# Altium PCB coilcube_v6.PcbDoc
Units mil, origin at the board's own origin, x right, y up, seen from the top; angles counter-clockwise.
Board outline 2150 x 950 mil, 4 copper layers (Top Layer, Signal Layer 1, Signal Layer 2, Bottom Layer), stack 30.634 mil thick; 85 components, 60 nets, 299 pads, 115 vias.
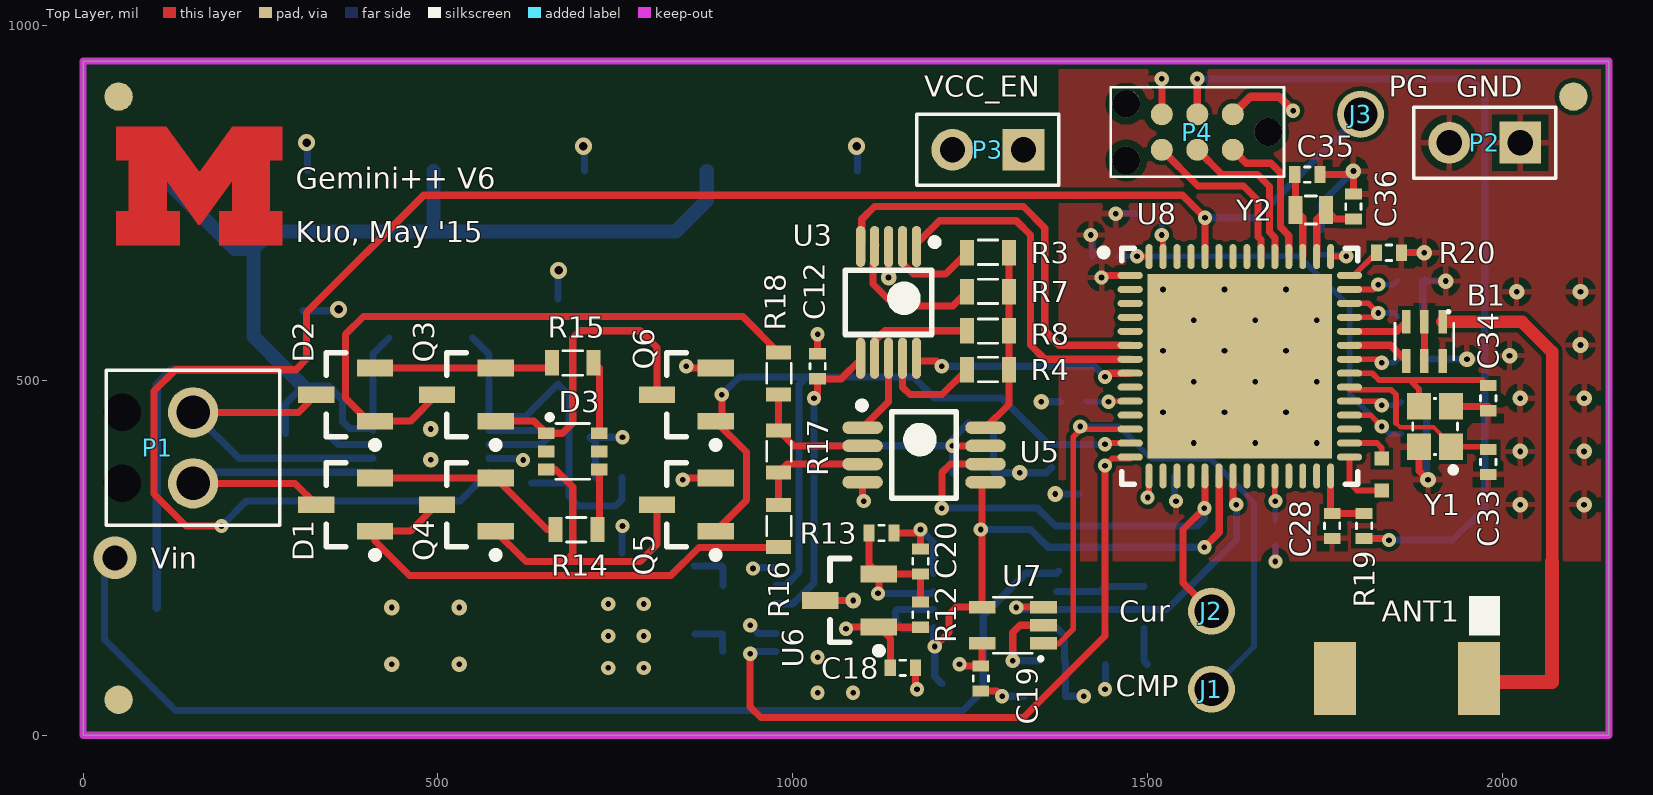
[diagram p0: Top Layer view]
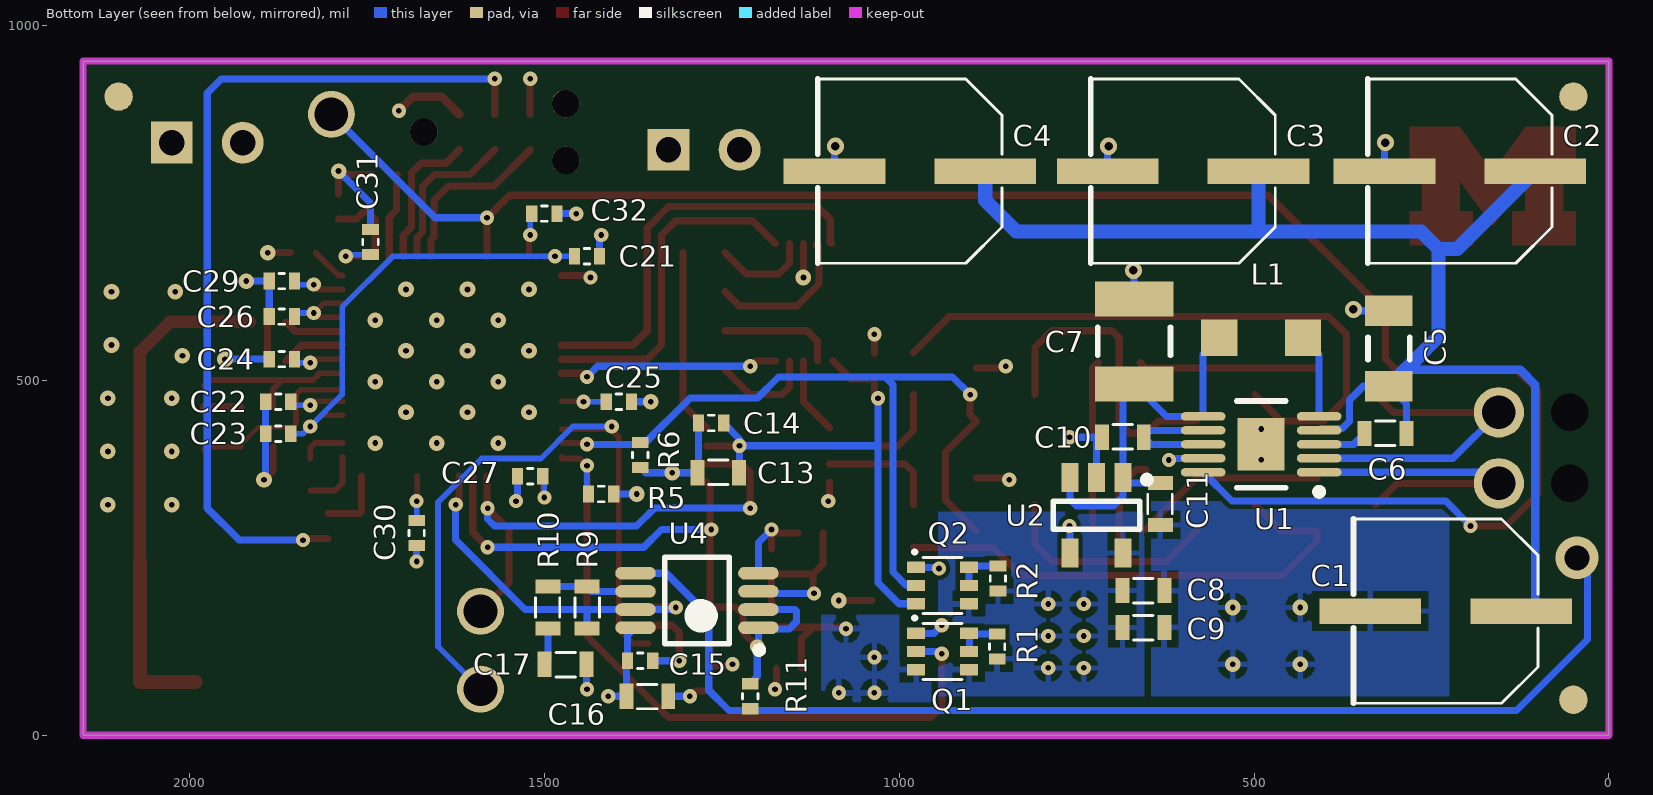
[diagram p1: Bottom Layer view, seen from below]
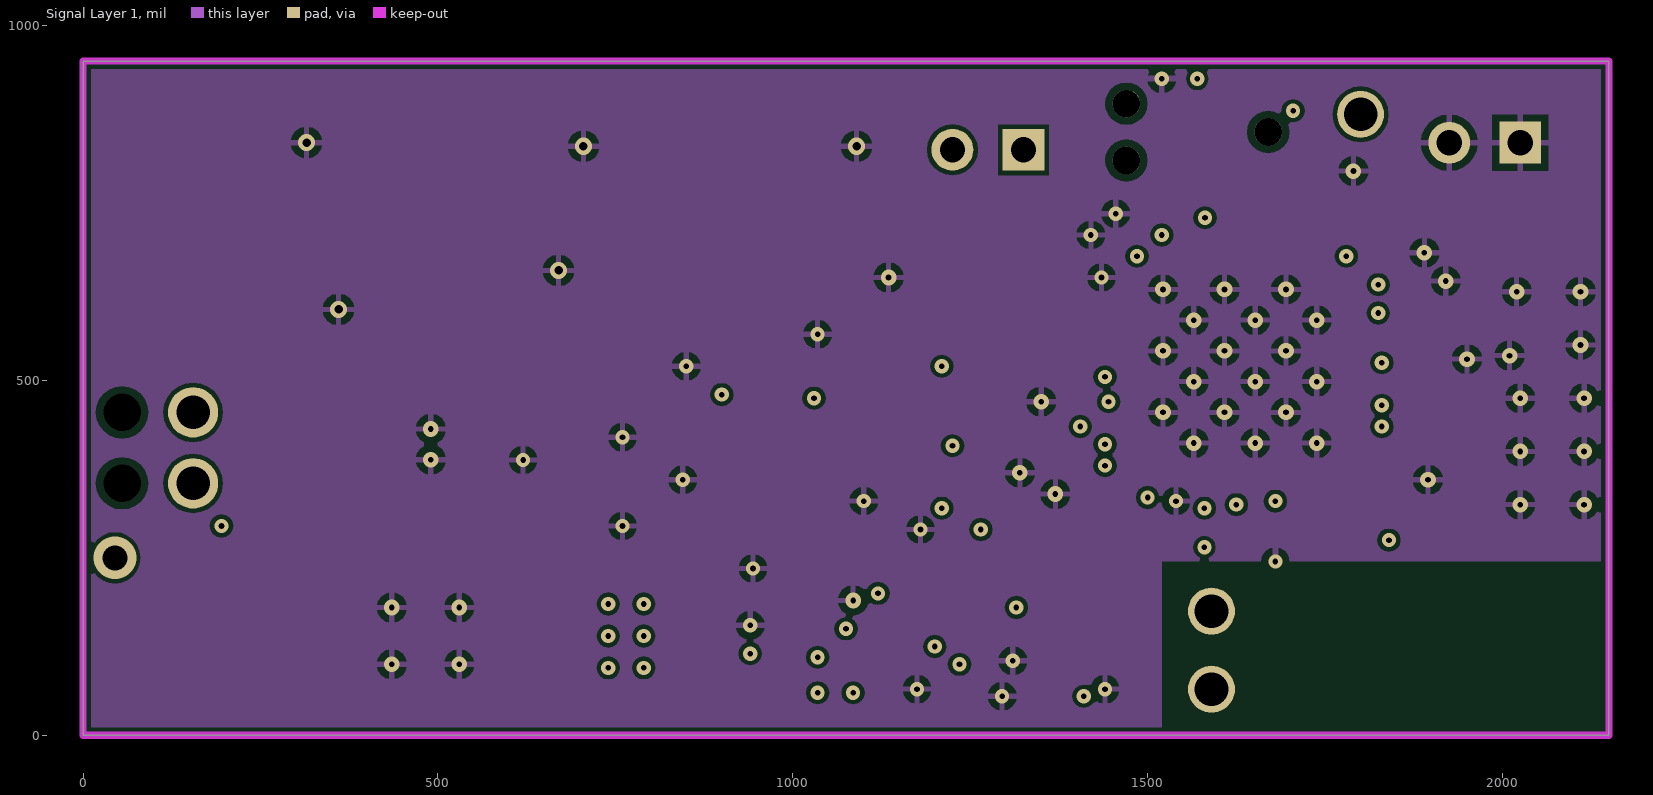
[diagram p2: Signal Layer 1]
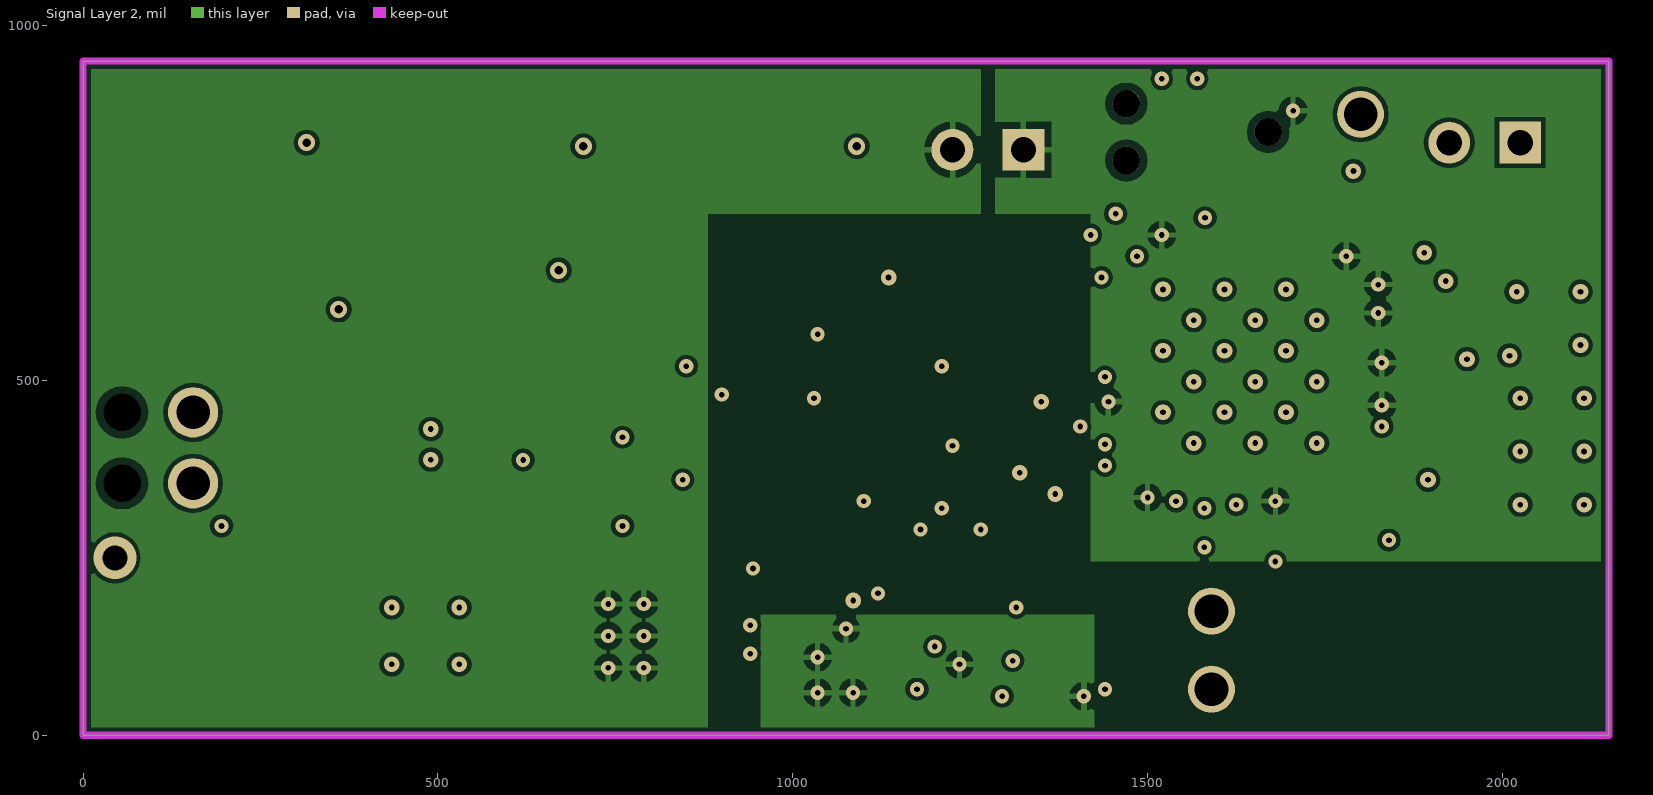
[diagram p3: Signal Layer 2]

## Layer stack, top to bottom
Top Solder: solder mask 0.4, Solder Resist, Dk 3.5
Top Layer: signal copper 1.4
Dielectric 1: core 10, FR-4, Dk 4.2
Signal Layer 1: signal copper 1.417
Dielectric 3: prepreg 5, Dk 4.2
Signal Layer 2: signal copper 1.417
Dielectric 2: core 10, Dk 4.2
Bottom Layer: signal copper 1.4
Bottom Solder: solder mask 0.4, Solder Resist, Dk 3.5

## Board outline
0,0 0,950 2150,950 2150,0

## Design rules (kind name [scope] priority, off if disabled: settings)
Clearance "non plated holes" [InPadClass('NPHOLES')] p1: gap=10 // Sunstone Circuits Minimum Clearance Rule (MLB~4&6 Layer Designs)
Clearance "Clearance~Sunstone Circuits" [All] p2: gap=6 // Sunstone Circuits Minimum Clearance Rule (MLB~4&6 Layer Designs)
DiffPairsRouting [All] p1: maxlimit=10 minlimit=10 mostfreqgap=10 toplayer_minwidth=6 toplayer_maxwidth=15 toplayer_prefwidth=15 midlayer1_minwidth=6 midlayer1_maxwidth=15 midlayer1_prefwidth=15 midlayer2_minwidth=6 midlayer2_maxwidth=15 midlayer2_prefwidth=15 bottomlayer_minwidth=6 bottomlayer_maxwidth=15 bottomlayer_prefwidth=15 maxuncoupledlength=500
HoleSize "HoleSize~Sunstone Circuits" [All] p1: absolutevalues=TRUE maxlimit=251 minlimit=8 maxpercent=80.000 minpercent=20.000 // Sunstone Circuits Hole Size Rule (MLB~4&6 Layer Designs)
HoleSize Testpoint [All] p2: absolutevalues=TRUE maxlimit=100 minlimit=1 maxpercent=80.000 minpercent=20.000
HoleSize TestPointUsage [All] p3: absolutevalues=TRUE maxlimit=100 minlimit=1 maxpercent=80.000 minpercent=20.000
MinimumAnnularRing "MinimumAnnularRing~Sunstone Circuits" [All] p1 off: minimumring=7 // Sunstone Circuits Minimum Annular Ring (MLB~4&6 Layer Designs)
MinimumSolderMaskSliver [All] p1 off: minsoldermaskwidth=10
PlaneClearance "PlaneClearance~Sunstone Circuits" [All] p1: clearance=12 // Sunstone Circuits Power Plane Clearance Rule (MLB~4&6 Layer Designs)
PlaneConnect "PlaneConnect~Sunstone Circuits" [All] p1: planeconnectstyle=Relief reliefexpansion=10 reliefentries=4 reliefconductorwidth=8 reliefairgap=10 // Sunstone Circuits Power Plane Connect Rule (MLB~4&6 Layer Designs)
PolygonConnect "PolygonConnect~Sunstone Circuits" [All] p1: connectstyle=Relief reliefconductorwidth=8 reliefentries=4 polygonreliefangle="90 Angle" airgapwidth=10 // Sunstone Circuits Polygon Connect Style (MLB~4&6 Layer Designs)
RoomDefinition MCU [InComponentClass('MCU')] p1 off: confinementstyle=ConfineIn formatcopy=TRUE lockcomponents=FALSE outline 1162.5,762.5 1162.5,887.5 1435.98,887.5 1435.98,924.96 1740.4,924.96 1740.4,934.9 1860,934.9 1860,708.7 1882.48,708.7 1882.48,668.7 1912.48,668.7 1912.48,620.91 1952.17,620.91 1952.17,517.48 2008.7,517.48 2008.7,206.06 2016.06,206.06 2016.06,8.9 1650,8.9 1650,5.1 1530.4,5.1 1530.4,326.93 1418.23,326.93 1418.23,441.3 1352.52,441.3 1352.52,762.5
RoomDefinition IVSense [InComponentClass('IVSense')] p2 off: confinementstyle=ConfineIn formatcopy=TRUE lockcomponents=FALSE outline 832.3,178.52 832.3,263.48 875.84,263.48 875.84,273.44 1006.3,273.44 1006.3,562.48 1053.15,562.48 1053.15,745 1229.84,745 1229.84,714.61 1331.26,714.61 1331.26,437.48 1393.7,437.48 1393.7,368.7 1462.48,368.7 1462.48,236.26 1529.61,236.26 1529.61,123.74 1526.26,123.74 1526.26,65.39 1411.26,65.39 1411.26,20.39 1238.7,20.39 1238.7,12.52 1181.3,12.52 1181.3,66.3 1112.52,66.3 1112.52,66.66 875.84,66.66 875.84,82.52 833.3,82.52 833.3,178.52
RoomDefinition harvesting2 [InComponentClass('harvesting2')] p3 off: confinementstyle=ConfineIn formatcopy=TRUE lockcomponents=FALSE outline 17.44,283.44 17.44,526.56 19.05,526.56 19.05,938.86 1175.95,938.86 1175.95,897.5 2087.5,897.5 2087.5,772.5 1175.95,772.5 1175.95,651.14 803.85,651.14 803.85,223.18 712.26,223.18 712.26,117.39 420.95,117.39 420.95,31.14 39.05,31.14 39.05,283.44
RoomDefinition current_switch [InComponentClass('current_switch')] p4 off: confinementstyle=ConfineIn formatcopy=TRUE lockcomponents=FALSE outline 5870,-265 6275,-265 6275,-55 5870,-55
RoutingVias "RoutingVias~Sunstone Circuits" [All] p1: holewidth=16 width=30 viastyle="Through Hole" minholewidth=6 minwidth=20 maxholewidth=20 maxwidth=40 // Sunstone Circuits Routing Vias Rule (MLB~4&6 Layer Designs)
ShortCircuit "ShortCircuit~Sunstone Circuits" [All] p1: allowed=FALSE // Sunstone Circuits Short Circuit Rule~Do Not Allow (MLB~4&6 Layer Designs)
SilkToSilkClearance [All] p1 off: silktosilkclearance=10
SilkToSolderMaskClearance [IsPad] p1 off: minsilkscreentomaskgap=10 clearancetoexposedcopper=TRUE
SolderMaskExpansion TentVias [isVia] p1: expansion=-20 // Sunstone Circuits Solder Mask Expansion Rule (MLB~4&6 Layer Designs)
SolderMaskExpansion "SolderMaskExpansion~Sunstone Circuits" [All] p2: expansion=3 // Sunstone Circuits Solder Mask Expansion Rule (MLB~4&6 Layer Designs)
ViasUnderSMD "ViasUnderSMD~Sunstone Circuits" [All] p1: allowed=FALSE // Sunstone Circuits Vias Under SMD~Do Not Allow (MLB~4&6 Layer Designs)
Width "Width~Sunstone Circuits" [All] p1: maxlimit=100 minlimit=6 preferedwidth=10 // Sunstone Circuits Minimum Width Rule (MLB~4&6 Layer Designs)
22 further rules are at their usual default settings.

## Classes and differential pairs
component class current_switch: D1 D2 D3 Q3 Q4 Q5 Q6 R14 R15 R16 R17 R18
component class harvesting2: C1 C2 C3 C4 C5 C6 C7 C8 C9 C10 C11 L1 P1 P2 U1 U2
component class IVSense: C12 C13 C14 C15 C16 C17 C18 C19 C20 Q1 Q2 R1 R2 R3 R4 R5 R6 R7 R8 R9 R10 R11 R12 R13 U3 U4 U5 U6 U7
component class MCU: ANT1 B1 C21 C22 C23 C24 C25 C26 C27 C28 C29 C30 C31 C32 C33 C34 C35 C36 J1 J2 J3 P3 P4 R19 R20 U8 Y1 Y2
pad class NPHOLES: P1- P4-0
differential pair CC2538_RF: +CC2538_RF_P -CC2538_RF_N

## Components (designator, comment, footprint, x,y, rotation, side; value= is the part's Value field where it differs from the comment)
ANT1 "Ground Antenna" "Chip Antenna" 1885,75 r180 top
B1 "2450BM15A0002E" 2450BM15A0002 1890,555 r270 top
C1 "Aluminum capacitor" KEMET_EDK_9H 230,175 r180 bottom
C2 "Aluminum capacitor" KEMET_EDK_9H 210,795 r180 bottom
C3 "Aluminum capacitor" KEMET_EDK_9H 600,795 r180 bottom
C4 "Aluminum capacitor" KEMET_EDK_9H 985,795 r180 bottom
C5 "Ceramic capacitor" 1206 310,545 r90 bottom
C6 "Ceramic capacitor" 0603 315,425 r0 bottom
C7 "Ceramic capacitor" 1210 665,555 r270 bottom
C8 "Ceramic capacitor" 0603 656,204 r180 bottom
C9 "Ceramic capacitor" 0603 656,152 r180 bottom
C10 "Ceramic capacitor" 0603 685,420 r0 bottom
C11 "Ceramic capacitor" 0603 632,326 r270 bottom
C12 "Ceramic capacitor" 0402 1035,520 r90 top
C13 "Ceramic capacitor" 0603 1255,370 r0 bottom
C14 "Ceramic capacitor" 0402 1265,440 r0 bottom
C15 "Ceramic capacitor" 0402 1365,105 r180 bottom
C16 "Ceramic capacitor" 0603 1355,55 r180 bottom
C17 "Ceramic capacitor" 0603 1470,100 r180 bottom
C18 "Ceramic capacitor" 0402 1155,95 r0 top
C19 "Ceramic capacitor" 0402 1265,80 r270 top
C20 "Ceramic capacitor" 0402 1180,245 r90 top
C21 "Ceramic capacitor" 0402 1440,675 r180 bottom
C22 "Ceramic capacitor" 0402 1875,470 r0 bottom
C23 "Ceramic capacitor" 0402 1875,425 r0 bottom
C24 "Ceramic capacitor" 0402 1870,530 r0 bottom
C25 "Ceramic capacitor" 0402 1395,470 r180 bottom
C26 "Ceramic capacitor" 0402 1870,590 r0 bottom
C27 "Ceramic capacitor" 0402 1520,365 r0 bottom
C28 "Ceramic capacitor" 0402 1760,295 r270 top
C29 "Ceramic capacitor" 0402 1870,640 r0 bottom
C30 "Ceramic capacitor" 0402 1680,285 r270 bottom
C31 "Ceramic capacitor" 0402 1745,695 r90 bottom
C32 "Ceramic capacitor" 0402 1500,735 r180 bottom
C33 "Ceramic capacitor" 0402 1980,385 r90 top
C34 "Ceramic capacitor" 0402 1980,475 r90 top
C35 "Ceramic capacitor" 0402 1725,790 r0 top
C36 "Ceramic capacitor" 0402 1790,745 r90 top
D1 "D_BAS40-04" SOT23-3 370,325 r180 top
D2 "D_BAS40-04" SOT23-3 370,480 r180 top
D3 "BAS40TW" SOT-363 690,400 r270 top
J1 "5004" TestPoint 1590,65 r0 top
J2 "5004" TestPoint 1590,175 r0 top
J3 "5004" TestPoint 1800,875 r0 top
L1 "Chip inductor" CDRH2D18 490,560 r180 bottom
P1 "Screw connector" MPT_2position 155,405 r270 top
P2 "1 x 2 header" "1x2 header" 1975,835 r180 top
P3 "1 x 2 header" "1x2 header" 1275,825 r180 top
P4 "TC2030" TC2030-IDC-NLFP 1570,850 r180 top
Q1 "Si1539CDL" SC70-6 939,118 r270 bottom
Q2 "Si1539CDL" SC70-6 939,211 r270 bottom
Q3 "Si2301CDS" SOT23-3 540,480 r180 top
Q4 "Si2301CDS" SOT23-3 540,325 r180 top
Q5 "Si2338DS" SOT23-3 850,325 r180 top
Q6 "Si2338DS" SOT23-3 850,480 r180 top
R1 "Chip resistor" 0402 862,125 r90 bottom
R2 "Chip resistor" 0402 861,221 r90 bottom
R3 "Chip resistor" 0603 1275,680 r180 top
R4 "Chip resistor" 0603 1275,515 r180 top
R5 "Chip resistor" 0402 1420,340 r180 bottom
R6 "Chip resistor" 0402 1365,395 r270 bottom
R7 "Chip resistor" 0603 1275,625 r180 top
R8 "Chip resistor" 0603 1275,570 r0 top
R9 "Chip resistor" 0603 1440,180 r90 bottom
R10 "Chip resistor" 0603 1495,180 r270 bottom
R11 "Chip resistor" 0402 1210,55 r270 bottom
R12 "Chip resistor" 0402 1180,170 r90 top
R13 "Chip resistor" 0402 1125,285 r0 top
R14 "Chip resistor" 0603 695,290 r0 top
R15 "Chip resistor" 0603 690,525 r0 top
R16 "Chip resistor" 0603 980,295 r90 top
R17 "Chip resistor" 0603 980,400 r90 top
R18 "Chip resistor" 0603 980,510 r90 top
R19 "Chip resistor" 0402 1805,295 r270 top
R20 "Chip resistor" 0402 1840,680 r0 top
U1 "LTC3588-1" TSSOP50P490X110_HS-11N 490,410 r0 bottom
U2 "TPS783" SOT23-5 722,310 r270 bottom
U3 "ADG704" USOIC-10 1135,610 r270 top
U4 "MCP6032" MSOP-8 1285,190 r0 bottom
U5 "INA333" MSOP-8 1185,395 r0 top
U6 "ISL21080" SOT23-3 1080,190 r180 top
U7 "TS881" SC70-5 1310,155 r90 top
U8 "CC2538" QFN56 1630,520 r0 top
Y1 "FA-128" FA-128 1905,435 r90 top
Y2 "ABS05" ABS05 1730,740 r180 top

## Footprints (in the part's own frame and the unit in brackets; to place one, negate y for a bottom-side part, rotate by r counter-clockwise, add the part's x,y. Pads: shape width x height; smd on the part's side, far side on the other; paste and mask are expansions set on the pad)
"1x2 header" [mm] "1x2 header, 100 mils"
  rect 1.5x1.5 hole 0.9: 1(-1.27,0)
  round 1.5 hole 0.9: 2(1.27,0)
  silkscreen extent -2.54,-1.27 2.54,1.27, body extent -2.53,-1.26 2.53,1.26, height 8.38
0402 [mm] "2-Leads, Body 1.00x0.50mm, IPC Medium Density"
  rect 0.4x0.6 smd: 1(-0.45,0) 2(0.45,0)
  silkscreen extent -0.1,-0.28 0.1,0.28, body extent -0.53,-0.28 0.53,0.27, height 0.4
0603 [mm] "2-Leads, Body 1.55x0.85mm, IPC Medium Density"
  rect 0.5x0.9 smd: 1(-0.75,0) 2(0.75,0)
  silkscreen extent -0.35,-0.45 0.35,0.43, body extent -0.75,-0.42 0.75,0.43, height 0.5
1206 [mm]
  rect 1.1x1.7 smd: 1(-1.35,0) 2(1.35,0)
  silkscreen extent -0.4,-0.75 0.4,0.75, body extent -1.7,-0.9 1.7,0.9, height 1.3
1210 [mm]
  rect 1.25x2.8 smd: 1(1.525,-0.102) 2(-1.525,-0.102)
  silkscreen extent -0.5,-1.4 0.5,1.2, body extent -1.8,-1.5 1.8,1.3, height 2.8
2450BM15A0002 [mm] "Chip Array, Flat, 6-Leads, Pitch 0.65mm,  Body 2.00x1.25mm,  IPC Medium Density"
  rect 0.85x0.3 smd: 1(-0.7,0.65) 2(-0.7,0) 3(-0.7,-0.65) 4(0.7,-0.65) 5(0.7,0) 6(0.7,0.65)
  silkscreen extent -1.11,-1.05 0.65,1.05, body extent -0.67,-1.05 0.67,1.05, height 0.81
ABS05 [mm] "ABS05 Crystal"
  rect 0.5x1 smd: 1(-0.55,0) 2(0.55,0)
  silkscreen extent -0.2,-0.5 0.2,0.5, body extent -0.8,-0.5 0.8,0.5, height 0.5
CDRH2D18 [mm] "Sumdia SMD power inductor"
  rect 1.3x1.3 smd: 1(-1.5,0) 2(1.5,0)
  body extent -1.5,-1.7 1.5,1.8, height 2
"Chip Antenna" [mm] "FR05-S1-N-0-102"
  rect 1.5x2.6 smd: 1(-2.075,-0.125) ""(3.075,-0.125)
  silkscreen extent -2.83,-3.08 -1.73,-1.68, body extent -3.03,-1.63 3.98,1.38, height 2.2
FA-128 [mm] "Seiko Epson FA-128 Crystal"
  rect 0.95x0.85 smd: 1(-0.725,-0.575) 2(0.725,-0.575) 3(0.725,0.575) 4(-0.725,0.575)
  silkscreen extent -1.63,-0.8 1,0.8, body extent -1,-0.8 1,0.8, height 0.5
KEMET_EDK_9H [mm] "Kemet surface mount aluminum capacitor EDK series 9H"
  rect 3.64x0.91 smd: 1(2.7,0) 2(-2.7,0)
  silkscreen extent -3.3,-3.3 3.3,3.3, body extent -3.3,-3.3 3.3,3.3, height 8.7
MPT_2position [mm] "Screw connector 2 pos"
  round 1.8 hole 1.2: 1(-1.27,0) 2(1.27,0)
  round 0 hole 1.346: ""(-1.27,-2.54) ""(1.27,-2.54)
  silkscreen extent -2.77,-3.1 2.77,3.1
MSOP-8 [mm] "TSOP, 8-Leads, Body 3.00x3.00mm, Pitch 0.65mm, IPC Medium Density"
  oval 1.45x0.45 smd: 1(-2.2,0.975) 2(-2.2,0.325) 3(-2.2,-0.325) 4(-2.2,-0.975) 5(2.2,-0.975) 6(2.2,-0.325) 7(2.2,0.325) 8(2.2,0.975)
  silkscreen extent -2.35,-1.55 1.15,1.9, body extent -1.55,-1.55 1.55,1.55, height 1.1
QFN56 [mm] "QFN, 56-Leads, Body 8.00x8.00mm, Pitch 0.50mm, Thermal Pad 6.60x6.60mm, IPC Medium Density"
  oval 0.9x0.25 smd: 1(-3.925,3.25) 2(-3.925,2.75) 3(-3.925,2.25) 4(-3.925,1.75) 5(-3.925,1.25) 6(-3.925,0.75) 7(-3.925,0.25) 8(-3.925,-0.25) 9(-3.925,-0.75) 10(-3.925,-1.25) 11(-3.925,-1.75) 12(-3.925,-2.25) 13(-3.925,-2.75) 14(-3.925,-3.25) 29(3.925,-3.25) 30(3.925,-2.75) 31(3.925,-2.25) 32(3.925,-1.75) 33(3.925,-1.25) 34(3.925,-0.75) 35(3.925,-0.25) 36(3.925,0.25) 37(3.925,0.75) 38(3.925,1.25) 39(3.925,1.75) 40(3.925,2.25) 41(3.925,2.75) 42(3.925,3.25)
  oval 0.25x0.9 smd: 15(-3.25,-3.925) 16(-2.75,-3.925) 17(-2.25,-3.925) 18(-1.75,-3.925) 19(-1.25,-3.925) 20(-0.75,-3.925) 21(-0.25,-3.925) 22(0.25,-3.925) 23(0.75,-3.925) 24(1.25,-3.925) 25(1.75,-3.925) 26(2.25,-3.925) 27(2.75,-3.925) 28(3.25,-3.925) 43(3.25,3.925) 44(2.75,3.925) 45(2.25,3.925) 46(1.75,3.925) 47(1.25,3.925) 48(0.75,3.925) 49(0.25,3.925) 50(-0.25,3.925) 51(-0.75,3.925) 52(-1.25,3.925) 53(-1.75,3.925) 54(-2.25,3.925) 55(-2.75,3.925) 56(-3.25,3.925)
  rect 6.6x6.6 smd: 57(0,0)
  silkscreen extent -5,-4.22 4.22,4.23, body extent -4.08,-4.07 4.07,4.08, height 1
SC70-5 [mm]
  rect 0.45x0.95 smd: 1(-0.65,-1.1) 2(0,-1.1) 3(0.65,-1.1) 4(0.65,1.1) 5(-0.65,1.1)
  silkscreen extent -1.2,-1.01 1,0.7, body extent -1,-0.7 1,0.7, height 1.1
SC70-6 [mm]
  rect 0.406x0.648 smd: 1(-0.65,-0.95) 2(0,-0.95) 3(0.65,-0.95) 4(0.65,0.95) 5(0,0.95) 6(-0.65,0.95)
  silkscreen extent -1.2,-1.01 1,0.7, body extent -1,-0.7 1,0.7, height 1.1
SOT23-3 [mm] "SOT23, 3-Leads, Body 2.9x1.3mm, Pitch 0.95mm, Lead Span 2.3mm, IPC Medium Density"
  rect 1.3x0.6 smd: 1(-1.05,0.95) 2(-1.05,-0.95) 3(1.05,0)
  silkscreen extent -1.18,-1.5 0.7,1.92, body extent -0.7,-1.5 0.7,1.5, height 1.2
SOT23-5 [mm] "SOT23, 5-Leads, Body 2.90x2.45mm, Pitch 0.95mm, IPC Medium Density"
  rect 1.05x0.6 smd: 1(-1.35,0.95) 2(-1.35,0) 3(-1.35,-0.95) 4(1.35,-0.95) 5(1.35,0.95)
  silkscreen extent -1.4,-1.55 0.5,1.92, body extent -0.88,-1.52 0.87,1.53, height 1.45
SOT-363 [mm]
  rect 0.42x0.6 smd: 1(-0.65,-0.95) 2(0,-0.95) 3(0.65,-0.95) 4(0.65,0.95) 5(0,0.95) 6(-0.65,0.95)
  silkscreen extent -1.28,-0.88 1,0.6, body extent -1,-0.6 1,0.6, height 1
TC2030-IDC-NLFP [mil]
  round 39 hole 39 unplated: 0(-100,0) 0(100,-40) 0(100,40)
  round 31 smd paste-196.85: 1(-50,-25) 2(-50,25) 3(0,-25) 4(0,25) 5(50,-25) 6(50,25)
  Top Layer pour cut-out: -50,25 -50,-25 50,-25 50,25
  silkscreen extent -122,-63 122,63
TestPoint [mm]
  round 1.68 hole 1.2: 1(0,0)
  body extent -1.26,-1.27 1.27,1.27, height 4.57
TSSOP50P490X110_HS-11N [mm] "TSSOP, 10-Leads, Body 3.00x3.00mm, Pitch 0.50mm, Thermal Pad 1.88.2x1.68.2mm, IPC Medium Density"
  oval 1.6x0.3 smd: 1(-2.075,1) 2(-2.075,0.5) 3(-2.075,0) 4(-2.075,-0.5) 5(-2.075,-1) 6(2.075,-1) 7(2.075,-0.5) 8(2.075,0) 9(2.075,0.5) 10(2.075,1)
  rect 1.68x1.88 smd: 11(0,0)
  silkscreen extent -2.2,-1.55 0.87,1.82, body extent -1.55,-1.55 1.55,1.55, height 1.1
USOIC-10 [mm] "SOIC, 10-Leads, Body 3.00x3.00mm, Pitch 1.27mm, IPC Medium Density"
  oval 1.47x0.33 smd: 1(-2,1) 2(-2,0.5) 3(-2,0) 4(-2,-0.5) 5(-2,-1) 6(2,-1) 7(2,-0.5) 8(2,0) 9(2,0.5) 10(2,1)
  silkscreen extent -2.28,-1.55 1.15,1.78, body extent -1.55,-1.55 1.55,1.55, height 1.1

## Part data
ANT1: "2.4GHz Surface Mount Device (SMD) On Ground Antenna, 50 Ohms"
B1: "2.45 GHz Balun for TI CC253X"
C1 C2 C3 C4: library part C_100u_35V_aluminum, "Aluminum capacitor, 100 uF, 35 V, KEMET EDK 9H"
C5: library part C_22u_35V_1206_ceramic, "Ceramic capacitor, 22 uF, 35 V, 1206 package"
C6 C9 C11: library part C_1u_16V_0603_ceramic, "Ceramic capacitor, 1 uF, 16 V, 0603 package"
C7: library part C_100u_10V_1210_ceramic, "Ceramic capacitor, 100u, 1210 package"
C8 C10: library part C_4.7u_10V_0603_ceramic, "Ceramic capacitor, 4.7u, 10V, 0603 package"
C12 C14 C15 C18 C19 C20: library part C_0.1u_16V_0402_ceramic, "Ceramic capacitor, 0.1u, 16 V, 0402 package"
C13 C16 C17: library part C_10u_6.3V_0603_ceramic, "Ceramic capacitor, 10 uF, 0603 package"
C21 C23 C32: library part C_1u_16V_0402_ceramic, "Ceramic capacitor, 1 uF, 16V, 0402 package"
C22 C24 C25 C26 C27 C30 C31: library part C_0.1u_10V_0402_ceramic, "Ceramic capacitor, 0.1u, 0402 package"
C28: library part C_1000p_50V_0402_ceramic, "Ceramic capacitor, 1000 pF, 0402 package"
C29: library part C_220p_50V_0402_ceramic, "Ceramic capacitor, 220 pF, 0402 package"
C33 C34: library part C_12p_0402_ceramic, "Ceramic capacitor, 12 pF, 0402 package"
C35 C36: library part C_22p_0402_ceramic, "Ceramic capacitor, 22 pF, 0402 package"
D1 D2: "SURFACE MOUNT SCHOTTKY BARRIER DIODE"
D3: library part D_BAS40TW, "SURFACE MOUNT SCHOTTKY BARRIER DIODE ARRAYS"
J1 J2 J3: library part TestPoint, "TEST POINT PC MINI .040\"D YELLOW"
L1: library part L_10uH_1A_180m, "Chip inductor, 10 uH,  1A, 180 mOhm"
P1: library part MPT_2POS, "Screw connector 2 positions"
P2 P3: "100 mils standard header"
P4: "TC2030-MCP-NL"
Q1 Q2: "N- and P-Channel 30 V (D-S) MOSFET"
Q3 Q4: "P-Channel 20 V (D-S) MOSFET"
Q5 Q6: "N-Channel 30 V (D-S) MOSFET"
R1 R2 R5 R6 R12 R13: library part R_1M_0402, "Chip resistor, 1M, 0402 package"
R3 R16 R18: library part R_0_0603, "Chip resistor, 0, 0603 package"
R4: library part R_100K_0603, "Chip resistor, 100K, 0603 package"
R7: library part R_24.9K_0603, "Chip resistor, 24.9K, 0603 package"
R8: library part R_11K_0603, "Chip resistor, 11K, 0603 package"
R9: library part R_51K_0603, "Chip resistor, 51K, 0603 package"
R10: library part R_100_0603, "Chip resistor, 100,  0603 package"
R11: library part R_100K_0402, "Chip resistor, 100K, 0402 package"
R14 R15: library part R_47K_0603, "Chip resistor, 47K, 0603 package"
R17: library part R_90.9_0603, "Chip resistor, 90.9, 0603 package"
R19: library part R_2.2K_0402, "Chip resistor, 2.2K, 0402 package"
R20: library part R_56K_0402, "Chip resistor, 56K, 0402 package"
U1: "Piezoelectric Energy   Harvesting Power Supply"
U2: "TPS783xx 500-nA IQ, 150-mA, Ultralow Quiescent Current  Low-Dropout Linear Regulator"
U3: "CMOS  Low Voltage 4 V, 4-Channel Multiplexer"
U4: "0.9 £gA, High Precision Op Amps"
U5: "Micro-Power (50£gA), Zero-Drift, Rail-to-Rail Out  Instrumentation Amplifier"
U6: "300nA NanoPower Voltage References"
U7: "Rail-to-rail 0.9 V nanopower comparator"
U8: "A Powerful System-On-Chip for 2.4-GHz IEEE 802.15.4, 6LoWPAN  and ZigBee Applications"
Y1: "MHz Range Crystal Unit"
Y2: "32768 Hz SMD Low profile crystal"

## Free pads (board coordinates)
  round 40 smd mask-5: ""(50,50) ""(50,900) ""(2100,900)
  round 40 smd far side mask-5: ""(50,50) ""(50,900) ""(2100,900)
  rect 20x20 smd: ""(1830,345) ""(1830,390)

## Via types
v1: diameter 20, hole 8, Top Layer to Bottom Layer, 65 vias
v2: diameter 22, hole 8, Top Layer to Bottom Layer, 44 vias
v3: diameter 24, hole 12, Top Layer to Bottom Layer, 5 vias
v4: diameter 60, hole 35, Top Layer to Bottom Layer, 1 vias

## Nets (pads, with @x,y where several pads share a name; then routed paths per layer and width w, separated by ;. In a path a pad name is that pad's centre, name@x,y a point inside that pad or via, vN(x,y) a via of type N, cw(c..) or ccw(c..) an arc to the next point about the centre after c; other vN are vias at no path point)
CC2538_RF_N: B1.3 U8.38 | length 85.4
  Top Layer w10: U8.38 1851.06,569.21 B1.3
CC2538_RF_P: B1.4 U8.37 | length 89
  Top Layer w10: U8.37 1842.32,549.53 B1.4
CURRENT_WAVEFORM: J2.1 U5.6 U8.19 | length 736
  Top Layer w10: v1(1210,320) 1210,370 1222.2,382.2 U5.6 ; U8.19 1580.79,320.79 v1(1580,320) 1550,290 1550,215 J2.1
  Bottom Layer w10: v1(1210,320) 1345,320 1370,295 1570,295 1580,305 v1(1580,320)
CURRENTMEASUREEN: Q2.2 Q5.1 Q6.1 R6.1 U8.13 | length 1178.1
  Top Layer w8: v1(1440,410) 1441.73,411.73 U8.13
  Top Layer w10: Q5.1 935,331.26 935,398.94 Q6.1 900,451.26 v1(900,480)
  Bottom Layer w10: v1(900,480) 925,505 1020,505 ; Q2.2 990,211 1009,230 1009,494 1020,505 ; v1(1440,410) 1360,410 1295,475 1200,475 1170,505 1020,505
GND: B1.2 B1.5 B1.6 C1.2 C2.2 C3.2 C4.2 C5.2 C7.2 C8.2 C9.2 C10.2 C11.2 C12.2 C13.2 C14.2 C15.2 C16.2 C17.2 C18.2 C19.2 C20.2 C21.2 C22.2 C23.2 C24.2 C25.2 C26.2 C27.2 C28.2 C29.2 C30.2 C31.2 C32.2 C33.1 C34.1 C35.2 C36.2 P2.1 P2.2 P4.5 Q1.1 Q2.1 Q5.2 Q6.2 R5.2 R6.2 R13.2 R20.2 U1.9 U1.11 U2.2 U2.4 U3.3 U4.4 U5.4 U6.3 U7.2 U8.1 U8.57 Y1.2 Y1.4 | length 2160.9
  Top Layer w10: v1(845,360) 847.4,362.4 Q5.2 ; v1(850,520) 852.6,517.4 Q6.2 ; C12.2 v1(1035,565) ; U6.3 v2(1085,190) ; U5.4 1098.39,331.61 v1(1100,330) ; v2(1135,645) U3.3@1135,692.68 ; R13.2 1175,285 v1(1180,290) C20.2 ; C18.2 1172.72,65 v1(1175,65) ; C19.2 1287.72,62.28 v1(1295,55) ; v1(1310,105) 1310,145 1320,155 U7.2 ; v1(1435,645) 1437.95,647.95 U8.1 ; P4.5 v1(1520,925) ; C35.2 1785,790 v2(1790,795) C36.2 ; R20.2 v2(1890,680) ; Y1.4 1882.36,372.64 v2(1895,360) ; B1.5 B1.2 ; Y1.2 1980,463.54 C34.1
  Bottom Layer w10: C5.2 358.15,598.15 v3(360,600) ; v3(315,835) 316.3,833.7 C2.2 ; U1.9 572.01,390 618,390 v1(620,388) ; C7.2 669,654 v3(670,655) ; v3(705,830) 706.3,828.7 C3.2 ; U2.2 722,412.53 C10.2 v1(760,420) ; U2.4 759.4,294.4 v1(760,295) ; v1(940,155) 951.41,143.59 Q1.1 ; v1(944,235) 945.59,236.59 Q2.1 ; v3(1090,830) 1091.3,828.7 C4.2 ; v1(1180,290) 1198.39,271.61 U4.4 ; C14.2 1282.72,371.81 C13.2 v2(1320,370) 1357.72,370 R6.2 ; v1(1295,55) C16.2 ; v1(1310,105) C15.2 ; v2(1350,470) C25.2 ; v2(1370,340) R5.2 ; v1(1420,705) 1422.28,702.72 C21.2 ; v1(1440,65) 1440.47,65.47 C17.2 ; v1(1455,735) C32.2 ; C27.2 1537.72,332.28 v1(1540,330) ; v1(1680,245) C30.2 ; C31.2 1745,750 v2(1790,795) ; C24.2 v2(1950,530) ; C26.2 C29.2 ; C29.2@1890,642.28 C29.2 ; C22.2 C23.2 1892.72,362.28 v2(1895,360) ; v2(1920,640) C29.2
  other v2: 435,100 530,100 435,180 530,180 2025,325 2115,325 490,388.35 2025,400 2115,400 1565.04,411.73 1651.65,411.73 1738.27,411.73 490,431.65 1521.73,455.04 1608.35,455.04 1694.96,455.04 2025,475 2115,475 1565.04,498.35 1651.65,498.35 1738.27,498.35 2010,535 1521.73,541.65 1608.35,541.65 1694.96,541.65 2110,550 1565.04,584.96 1651.65,584.96 1738.27,584.96 2020,625 2110,625 1521.73,628.27 1608.35,628.27 1694.96,628.27
IN+: R16.2 R17.1 U5.3 | length 169.2
  Top Layer w10: R16.2 R17.1 991.73,382.2 U5.3
IN-: R17.2 R18.1 U5.2 | length 178.3
  Top Layer w10: R18.1 R17.2 1001.73,407.8 U5.2
NetANT1_1: ANT1.1 B1.1 | length 715.4
  Top Layer w18: B1.1 2027.44,582.56 2070,540 2070,245
  Top Layer w19.7: ANT1.1@1991.69,74.92 2070,74.92 2070,245
NetC6_2: C6.2 U1.3 | length 70
  Bottom Layer w10: C6.2 359.53,410 U1.3
NetC10_1: C10.1 U1.7 U1.8 | length 175.7
  Bottom Layer w10: U1.8 645.47,410 C10.1 645.79,429.68 U1.7
NetC17_1: C17.1 R10.2 | length 52.3
  Bottom Layer w10: R10.2 1495,104.53 C17.1
NetC21_1: C21.1 C23.1 U8.32 U8.56 | length 644.8
  Top Layer w8: v1(1485,675) 1485.47,674.53 U8.56 ; U8.32 1813.9,451.1 v1(1830,435)
  Bottom Layer w8: C21.1 v1(1485,675) 1713.46,675 1785,603.46 1785,480 v1(1830,435) 1840,425 C23.1
NetC28_1: C28.1 R19.1 U8.28 | length 98.6
  Top Layer w10: U8.28 1757.95,314.76 C28.1 R19.1
NetC33_2: C33.2 U8.34 Y1.1 | length 259.1
  Top Layer w6: 1850,440 1855.84,434.16 1902.82,434.16 1927.64,409.34 Y1.1
  Top Layer w8: U8.34 1784.53,486.71 1843.29,486.71 1850,480 1850,440 ; Y1.1 1976.26,406.46 C33.2
NetC34_2: C34.2 U8.35 Y1.3 | length 245.3
  Top Layer w8: U8.35 1816.56,510.16 1826.01,500.71 1869.29,500.71 ; Y1.3 1882.36,487.64 1869.29,500.71 ; C34.2 1972.01,500.71 1869.29,500.71
NetC35_1: C35.1 U8.45 Y2.2 | length 120.2
  Top Layer w10: C35.1 1708.35,788.94 Y2.2 1718.58,729.76 U8.45
NetC36_1: C36.1 U8.44 Y2.1 | length 114.6
  Top Layer w10: U8.44 1738.27,726.61 Y2.1 1764.37,727.28 C36.1
NetD1_1: D1.1 Q4.3 R16.1 | length 722.7
  Top Layer w10: Q4.3 461.26,287.6 D1.1 411.34,273.66 460,225 828,225 867.79,264.79 980,264.79 R16.1
NetD1_2: D1.2 Q4.2 R14.1 | length 284.1
  Top Layer w10: D1.2 Q4.2 653.74,290 R14.1
NetD1_3: D1.3 P1.2 U1.1 | length 445.9
  Top Layer w10: P1.2 298.66,355 D1.3
  Bottom Layer w10: P1.2 170.63,370.63 U1.1
NetD2_1: D2.1 Q3.3 R18.2 | length 888.8
  Top Layer w10: Q3.3 461.26,442.6 D2.1 402.4,442.6 370,475 370,565 395,590 929.53,590 R18.2
NetD2_2: D2.2 Q3.2 R15.1 | length 252.3
  Top Layer w10: D2.2 Q3.2 652.87,517.4 R15.1
NetD2_3: D2.3 P1.1 U1.2 | length 464.1
  Top Layer w10: P1.1 303.66,455 D2.3
  Bottom Layer w10: P1.1 219.69,390.31 U1.2
NetD3_1: D3.1 Q3.1 Q6.3 | length 441.1
  Top Layer w10: Q3.1 635.59,442.6 D3.1 674.41,425.59 675,425 690,440 690,560 700,570 785,570 808.66,546.34 Q6.3
NetD3_3: D3.3 Q4.1 Q5.3 | length 467.8
  Top Layer w10: Q4.1 623.94,245 680,245 ; D3.3 665.59,374.41 690,350 690,255 680,245 ; Q5.3 808.66,268.66 785,245 680,245
NetD3_4: D3.4 R14.2 | length 85.6
  Top Layer w10: R14.2 727.4,292.87 D3.4
NetD3_6: D3.6 R15.2 | length 102.7
  Top Layer w10: R15.2 727.4,517.13 D3.6
NetL1_2: L1.2 U1.5 | length 120
  Bottom Layer w10: U1.5 408.31,537.36 L1.2
NetQ1_5: Q1.5 Q1.6 R1.2 | length 63.8
  Bottom Layer w10: R1.2 900.72,142.72 900.72,118.87 Q1.5
NetQ2_5: Q2.5 Q2.6 R2.2 | length 67.1
  Bottom Layer w10: R2.2 899.47,238.72 Q2.6 Q2.5
NetR3_2: R3.2 U3.2 | length 136.9
  Top Layer w10: U3.2@1154.68,692.68 1154.68,665.32 1170,650 1215.47,650 R3.2
NetR4_2: R4.2 U3.9 | length 146.6
  Top Layer w10: U3.9@1154.68,527.32 1154.68,490.32 1165,480 1210.47,480 R4.2
NetR7_2: R7.2 U3.4 | length 214.5
  Top Layer w10: U3.4@1115.32,692.68 1116.91,691.08 1113.72,691.08 1113.72,665.7 1113,664.98 1113,635.89 1143.89,605 1225.47,605 R7.2
NetR8_1: R8.1 U3.7 | length 164.2
  Top Layer w10: U3.7@1115.32,527.32 1115.32,555.32 1130,570 R8.1
NetR9_2: R9.2 R10.1 U4.6 | length 126.2
  Bottom Layer w10: U4.6 1433.27,202.8 R9.2 R10.1
NetR20_1: R20.1 U8.42 | length 51
  Top Layer w8: U8.42 1790.24,647.95 R20.1
NetU3_1: U3.1 U8.7 | length 486.1
  Top Layer w10: U3.1@1174.37,692.68 1206.69,725 1315,725 1335,705 1335,550 1355.16,529.84 U8.7
NetU3_5: U3.5 U8.6 | length 586.7
  Top Layer w10: U3.5@1095.63,692.68 1097.23,694.28 1097.23,727.23 1115,745 1325,745 1355,715 1355,570 1375.47,549.53 U8.6
NetU3_10: U3.10 U8.8 | length 309.1
  Top Layer w10: U3.10@1174.37,527.32 1202.68,527.32 v1@1207.6,522.4 ; v1(1440,505) 1445.16,510.16 U8.8
  Bottom Layer w10: v1(1210,520) 1425,520 v1(1440,505)
PD3: pad.@1830,345 U8.29 | length 86.4
  Top Layer w8: U8.29 1784.53,355.47 1795,345 pad.@1830,345
PD4: pad.@1830,390 U8.30 | length 63.3
  Top Layer w8: U8.30 1823.27,411.73 1830,405 pad.@1830,390
PGOOD: J3.1 U1.10 U8.52 | length 2647.9
  Top Layer w10: v1(195,295) 145,295 100,340 100,485 130,515 300,515 315,530 315,596 480,761 1549,761 v1(1580.79,729.21) U8.52
  Bottom Layer w10: v1(195,295) 230,330 531.06,330 U1.10 ; v1(1580.79,729.21) 1654.21,729.21 J3.1
R\E\S\E\T\: P4.3 R19.2 | length 1237.9
  Top Layer w10: P4.3 v1(1570,925) ; R19.2 1837.72,277.28 v1(1840,275)
  Bottom Layer w10: v1(1570,925) 1955,925 1975,905 1975,320 1930,275 v1(1840,275)
RG1: U3.8 U5.1 | length 109.1
  Top Layer w10: U5.1 1135,470 U3.8@1135,527.32
RG2: R3.1 R4.1 R7.1 R8.2 U5.8 | length 260.2
  Top Layer w10: U5.8 1304.53,466.3 R4.1 R8.2 R7.1 R3.1
TCK: P4.4 U8.47 | length 225
  Top Layer w10: P4.4 1605,790 1655,790 1671.5,773.5 1671.5,709.13 1679.21,701.42 U8.47
TDO: P4.6 U8.48 | length 245.8
  Top Layer w10: P4.6 1571,774 1635,774 1655.5,753.5 1655.5,702.5 1659.53,698.48 U8.48
TMS: P4.2 U8.46 | length 203.7
  Top Layer w10: P4.2 1639,806 1674,806 1687.5,792.5 1687.5,715.76 1698.9,704.37 U8.46
V_HARVEST: C7.1 C11.1 L1.1 U1.6 U2.1 U2.3 | length 572
  Bottom Layer w10: L1.1 571.69,537.36 U1.6 623.41,449.37 C7.1 684.6,479.36 U2.1 ; C11.1 676.98,355.53 U2.1 ; U2.3 759.4,332.4 750,323 698,323 684.6,336.4 U2.1
VCAP: C1.1 C2.1 C3.1 C4.1 C5.1 C6.1 U1.4 | length 1922.2
  Bottom Layer w10: C6.1 285.47,467.32 C5.1 346.14,491.85 365.81,472.18 365.81,442.37 375.71,432.46 405.53,432.46 U1.4
  Bottom Layer w12: C1.1@103.7,180 103.7,493.7 125,515 286.85,515
  Bottom Layer w20: C2.1 213.7,685 240,685 ; C5.1 286.85,515 240,561.85 240,685 ; C3.1 493.7,711.3 495,710 ; C4.1 878.7,753.7 835,710 495,710 ; 240,685 265,710 495,710
VCC3: C8.1 C9.1 P3.2 Q1.4 Q2.4 R1.1 R2.1 U2.5
  other v1: 740,95 790,95 740,140 790,140 740,185 790,185
VCC3_GATED1: C15.1 C16.1 C18.1 C19.1 Q1.3 R12.1 U4.8 U6.1 U7.5 | length 360.9
  Top Layer w10: v1(1075,150) 1077.6,152.6 1115,152.6 1115.31,152.28 U6.1@1121.65,152.28 ; C18.1@1137.72,95 1137.72,136.22 U6.1@1121.65,152.28 ; R12.1 U6.1@1121.65,152.28 ; v1(1235,100) 1237.28,97.72 C19.1 1266.69,99.41 U7.5
  Bottom Layer w10: U4.8 1382.72,140.51 C15.1 1384.53,103.19 C16.1 v1(1410,55)
  other v1: 1035,60 1085,60 1035,110
VCC3_GATED2: C12.1 C13.1 C14.1 Q2.3 U3.6 U5.7 | length 745.9
  Top Layer w10: v1(1030,475) 1035,480 C12.1 1068.37,502.28 U3.6@1093.41,527.32 ; v1(1225,408) 1225.2,407.8 U5.7
  Bottom Layer w10: Q2.3 1000.41,185.41 1030,215 1030,410 ; v1(1030,475) 1030,410 ; C13.1 1225,370.47 v1(1225,408) ; C14.1 1225,417.72 v1(1225,408) ; 1030,410 1032,408 v1(1225,408)
VCC_MCU: C22.1 C24.1 C25.1 C26.1 C27.1 C29.1 C30.1 C31.1 C32.1 P3.1 P4.1 U8.10 U8.15 U8.24 U8.33 U8.36 U8.39 U8.40 U8.41 U8.43 U8.55 | length 753.9
  Top Layer w8: v1(1445,470) 1445.79,470.79 U8.10 ; v1(1500,335) 1502.05,337.05 U8.15 ; v1(1520,705) 1521.73,703.27 U8.55 ; U8.24 1679.21,330.79 v1(1680,330) ; U8.43 1779.53,674.53 v1(1780,675) ; U8.33 1824.21,470.79 v1(1830,465) ; U8.36 1825.16,529.84 v1(1830,525) ; U8.39 1818.9,588.9 v1(1825,595) 1811.42,608.58 U8.40 ; U8.41 1818.27,628.27 v1(1825,635)
  Top Layer w12: P4.1 1645,900 1685,900 v1(1705,880)
  Bottom Layer w8: C25.1 v1(1445,470) ; v1(1500,335) 1500,362.72 C27.1 ; v1(1520,705) C32.1@1520,737.28 ; C30.1 v1(1680,330) ; C31.1 1777.72,677.28 v1(1780,675) ; v1(1825,595) 1847.28,595 C26.1 ; v1(1825,635) 1847.28,635 C29.1 ; v1(1830,465) 1852.28,465 C22.1 ; v1(1830,525) 1847.28,525 C24.1
VOLTAGE_WAVEFORM: R9.1 U4.7 U7.3 U8.21 | length 509.4
  Top Layer w10: v1(1315,180) 1315.59,180.59 U7.3 ; U8.21 1620.16,329.84 v1(1625,325)
  Bottom Layer w10: v1(1315,180) 1317.8,177.2 U4.7 1440,177.2 ; R9.1 1440,177.2 ; v1(1625,325) 1625,275 1527.2,177.2 1440,177.2
VOLTAGEMEASUREEN: Q1.2 R5.1 U8.14 | length 985.4
  Top Layer w8: v1(1440,380) 1450,390 1475.47,390 U8.14
  Top Layer w10: v1(940,115) 940,40 955,25 1325,25 1440,140 v1(1440,380)
  Bottom Layer w8: R5.1@1440,342.72 v1(1440,380)
  Bottom Layer w10: v1(940,115) 943,118 Q1.2
VOLTAGESENSEIN: R11.2 U4.5 | length 1650.6
  Bottom Layer w10: v4(45,250) 30,235 30,135 130,35 1240,35 1268.39,63.39 1268.39,168.39 1328.39,228.39 U4.5 U4.5@1375,231.77
VOLTAGETRIGGER: J1.1 U7.1 U8.12 | length 983.1
  Top Layer w8: U7.1 1375,129.41 1395,149.41 1395,420 1406.42,431.42 U8.12
  Bottom Layer w8: v1(1405,435) 1460,435 1505,390 1588.28,390 1650,328.28 1650,125 J1.1
VREF: C20.1 R12.2 R13.1 U4.3 U6.2 | length 269.2
  Top Layer w10: R13.1 1107.28,241.46 U6.2 ; v1(1120,200) 1121.34,201.34 U6.2 ; R12.2 C20.1 1121.46,227.28 U6.2
  Bottom Layer w10: v1(1120,200) 1195.59,200 U4.3
VREF_BUF: R11.1 U4.1 U4.2 U5.5 U7.4 U8.20 | length 928.4
  Top Layer w10: v1(1200,125) 1220,145 1220,170 1230.59,180.59 U7.4 1266.69,351.69 U5.5 ; v1(1580,265) 1601,286 1601,364.94 U8.20
  Bottom Layer w10: U4.2 1147.2,177.2 1145,175 1145,160 1155,150 1196.77,150 U4.1 1198.39,126.61 v1(1200,125) 1200,82.72 R11.1 ; v1(1265,290) 1335,290 1360,265 v1(1580,265)
pads on no net: ANT1. D3.2 D3.5 P1. P4.0 U8.2 U8.3 U8.4 U8.5 U8.9 U8.11 U8.16 U8.17 U8.18 U8.22 U8.23 U8.25 U8.26 U8.27 U8.31 U8.49 U8.50 U8.51 U8.53 U8.54

## Polygon pours and split planes (outlines as drawn)
GND on Bottom Layer "Top Layer-No Net" (solid, pour order 12): 645,55 225,55 225,250 225,330 645,330
VCC3 on Bottom Layer "Bottom Layer-No Net" (solid, pour order 9): 655,315 655,55 945,55 945,315
VCC3_GATED1 on Bottom Layer "Top Layer-No Net" (solid, pour order 10): 955,45 955,105 975,105 1000,105 1000,165 1000,170 1110,170 1110,45
VCC_MCU on Signal Layer 2 "Top Layer-No Net" (solid, pour order 15): 1285,950 1285,735 1380,735 1420,735 1420,245 2150,245 2150,305 2150,950
VCC3 on Signal Layer 2 "Top Layer-No Net" (solid, pour order 14): 880,0 880,735 1270,735 1265,735 1265,950 0,950 0,0 805,0
VCC3_GATED1 on Signal Layer 2 "Top Layer-No Net" (solid, pour order 11): 955,55 955,170 1150,170 1425,170 1425,0 955,0
GND on Signal Layer 1 "Top Layer-No Net" (solid, pour order 13): 0,0 0,950 2150,950 2150,0
GND on Top Layer "Top Layer-No Net" (solid, pour order 16): 2150,245 2150,950 2005,950 1375,950 1375,245

## Keep-outs
Keep-Out Layer:
  the board outline again, w10

## Other copper
Top Layer:
  region: 46.75,690.73 135.91,690.73 135.91,738.33 117.78,738.33 117.78,781.4 161.98,719.44 165,719.44 209.96,781.4 209.96,738.33 191.82,738.33 191.82,690.73 280.98,690.73 280.98,738.33 262.85,738.33 262.85,810.11 280.98,810.11 280.98,857.71 210.33,857.71 165,795 162.73,795 117.4,857.71 46.75,857.71 46.75,810.11 64.13,810.11 64.13,738.33 46.75,738.33
Signal Layer 1:
  pour cut-out: 2150,0 2150,245 1520,245 1520,0

## Silkscreen, mask and mechanical layers (free items; w line width, h text height)
Top Overlay:
  text "VCC_EN" at 1185,900 h30
  text "PG" at 1840,900 h30
  text "GND" at 1935,900 h30
  text "Gemini++ V6" at 300,770 h30
  text "Kuo, May '15" at 300,695 h30
  text "Vin" at 95,235 h30
  text "Cur" at 1460,160 h30
  text "CMP" at 1455,55 h30